# Altium PCB PCB.PcbDoc
Units mm, origin at the board's own origin, x right, y up, seen from the top; angles counter-clockwise.
Board outline 100 x 100 mm, 2 copper layers (Top Layer, Bottom Layer); 51 components, 32 nets, 171 pads, 426 vias.
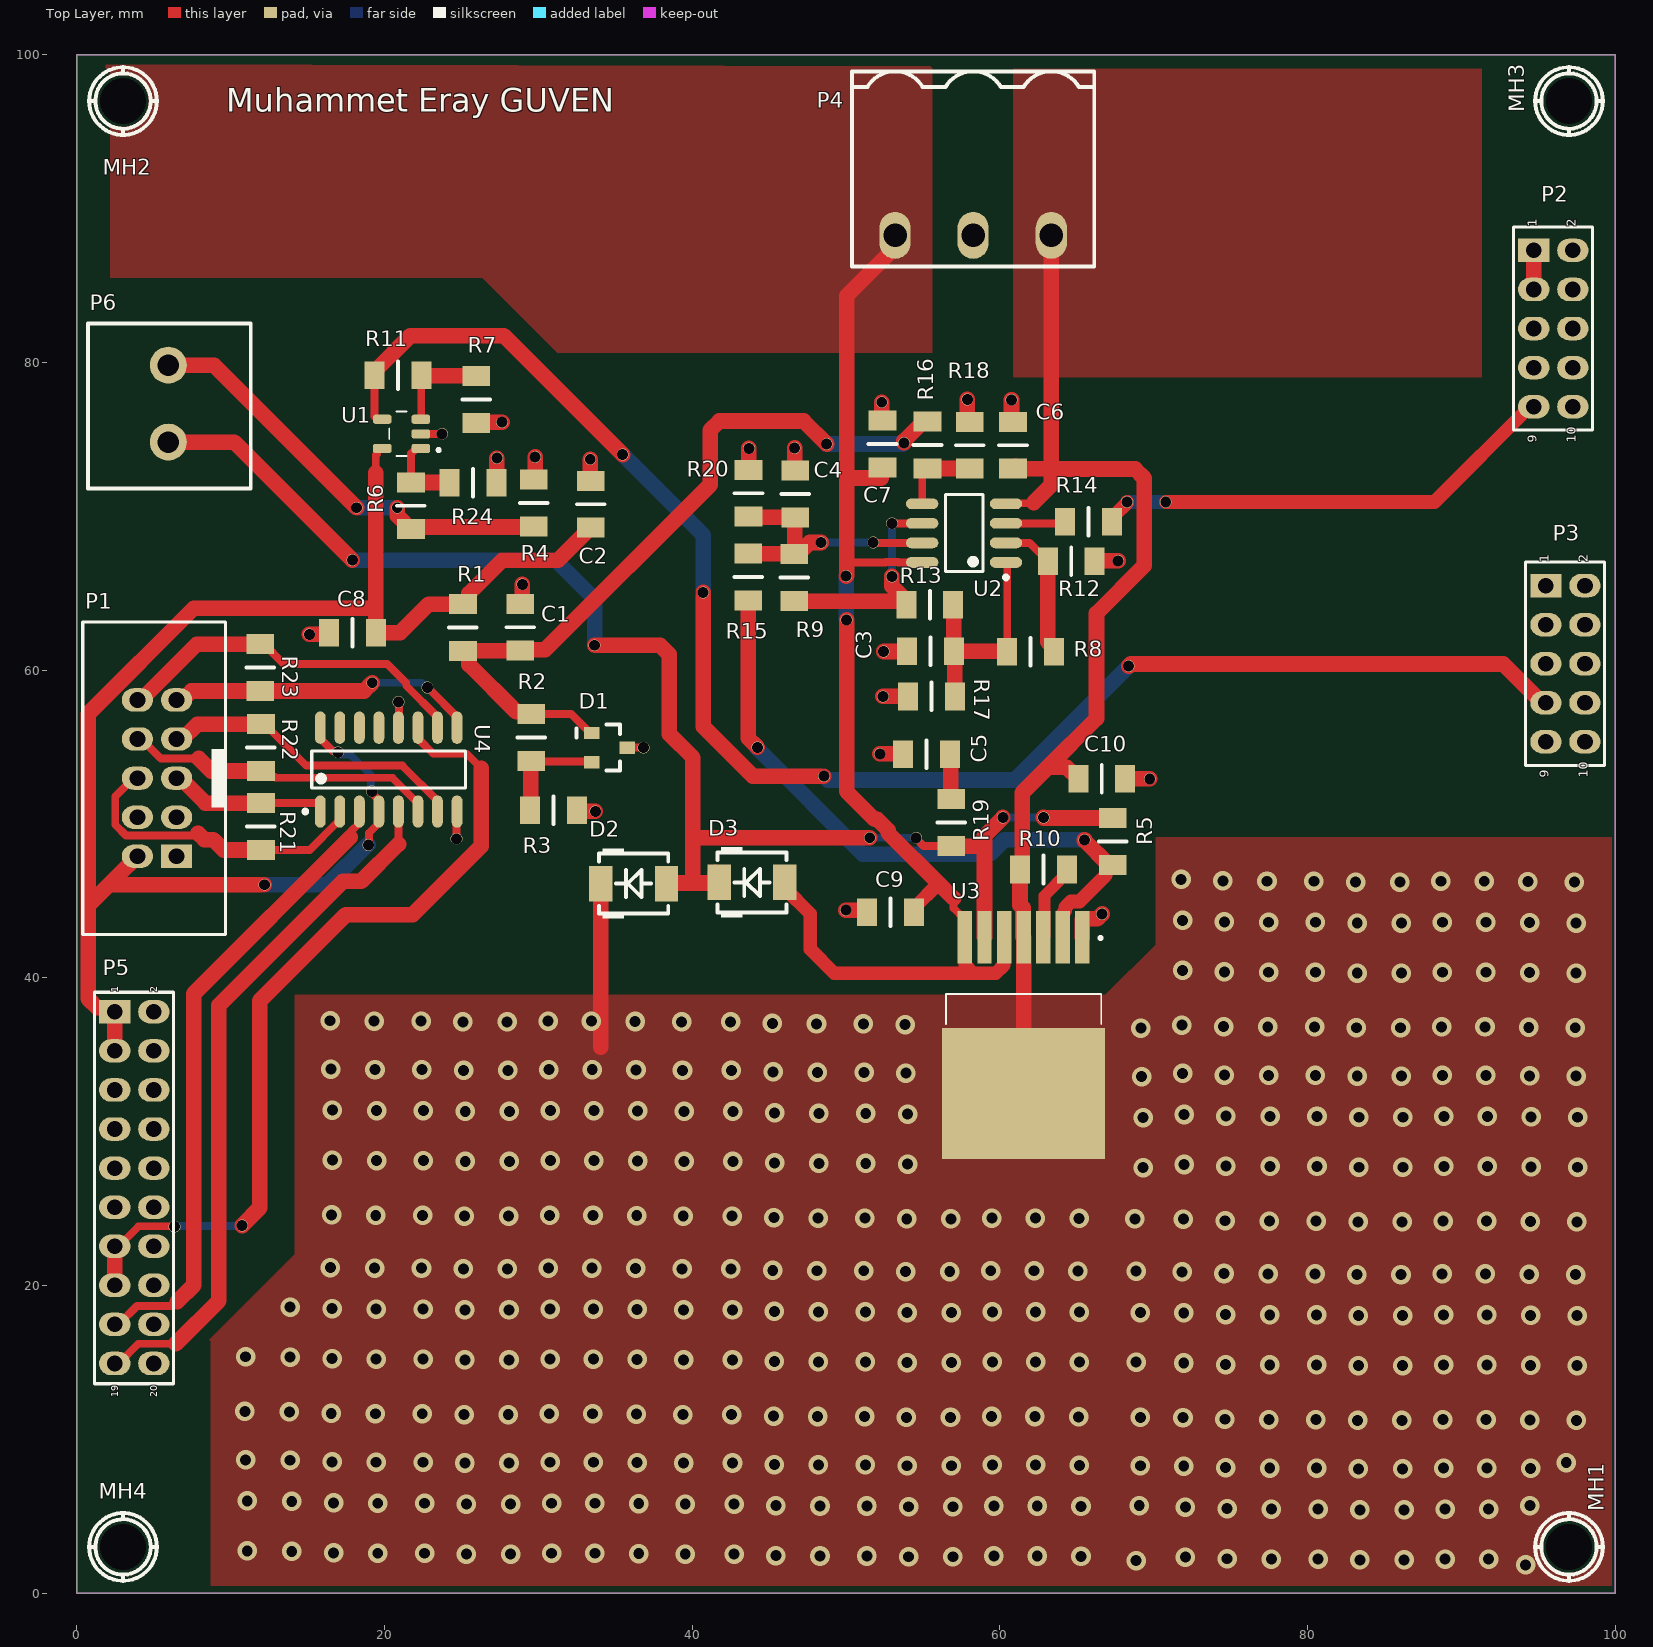
[diagram p0: Top Layer view]
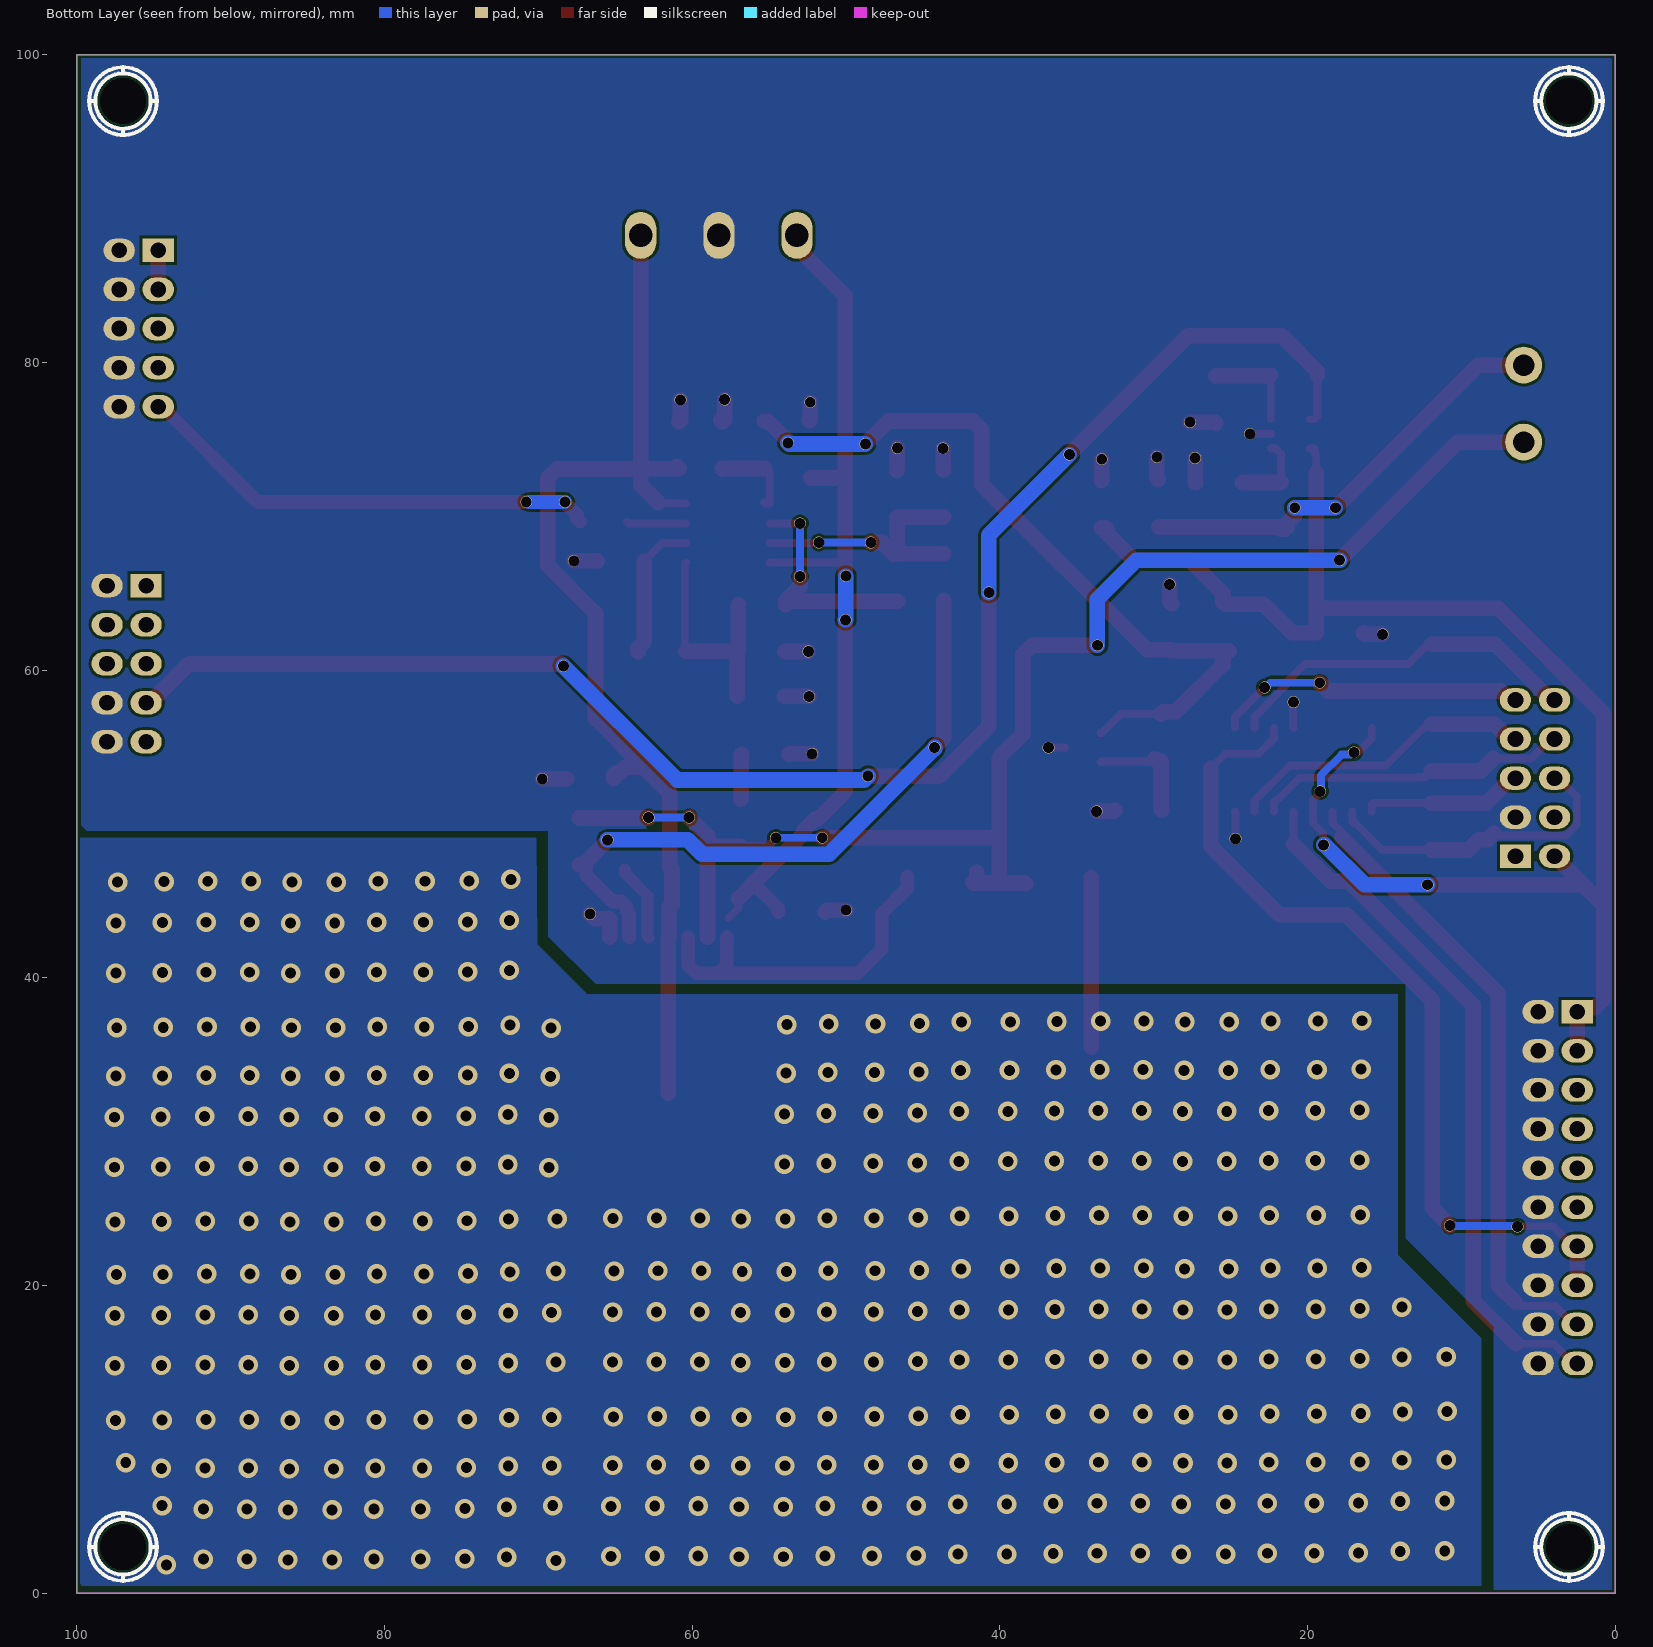
[diagram p1: Bottom Layer view, seen from below]
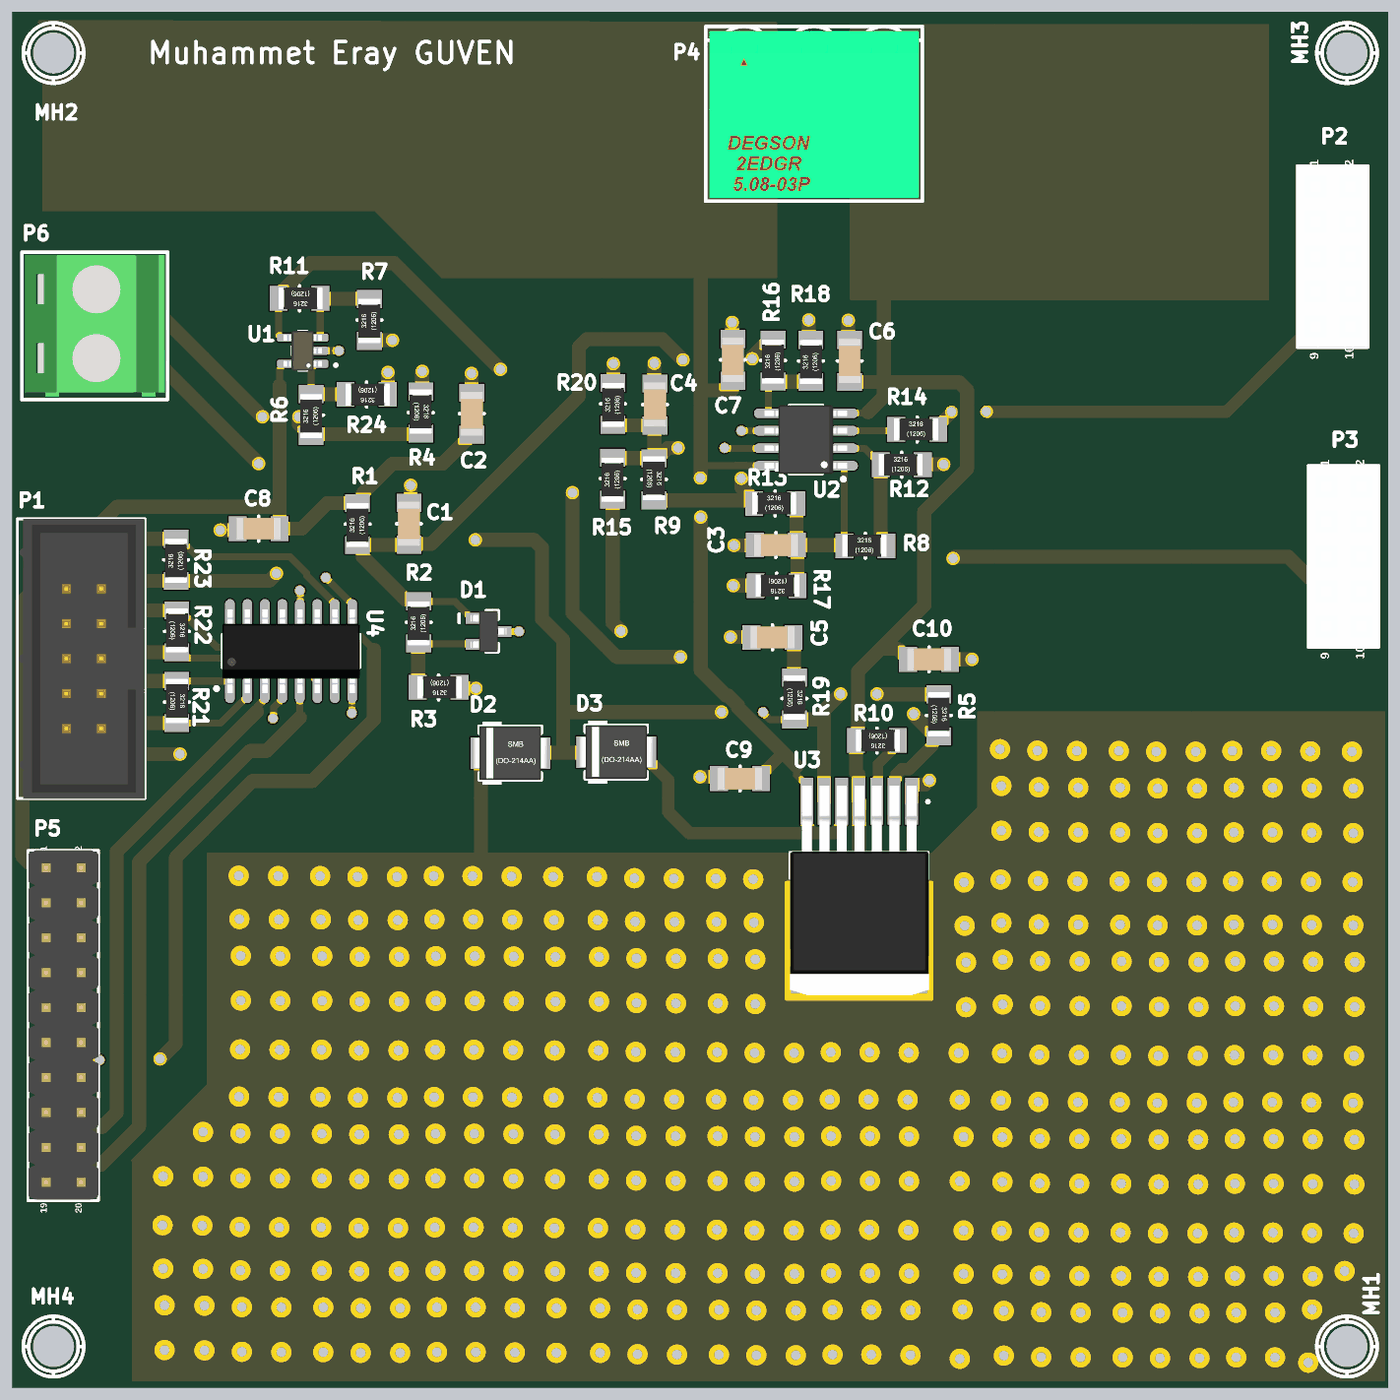
[diagram p2: 3D render of the assembled board from above, using the file's embedded part models]

## Layer stack, top to bottom
Top Solder: solder mask 0.0102, Solder Resist, Dk 3.5
Top Layer: signal copper 0.0356
Dielectric 1: dielectric 0.32, FR-4, Dk 4.8
Bottom Layer: signal copper 0.0356
Bottom Solder: solder mask 0.0102, Solder Resist, Dk 3.5

## Board outline
0,0 0,100 100,100 100,0

## Design rules (kind name [scope] priority, off if disabled: settings)
Clearance [All] p1: gap=0.178 ignorepadtopadclearanceinfootprint=FALSE
HoleSize [All] p1: absolutevalues=TRUE maxlimit=25.4 minlimit=0.025 maxpercent=80.000 minpercent=20.000
PolygonConnect PolygonConnect_2 [All vs IsNamedPolygon('NONET_L-01_P-001')] p1: connectstyle=Direct reliefconductorwidth=0.254 reliefentries=4 polygonreliefangle="90 Angle" airgapwidth=0.254
PolygonConnect PolygonConnect_1 [All vs IsNamedPolygon('NONET_L-01_P-001')] p2: connectstyle=Direct reliefconductorwidth=0.254 reliefentries=4 polygonreliefangle="90 Angle" airgapwidth=0.254
PolygonConnect [All] p3: connectstyle=Relief reliefconductorwidth=0.254 reliefentries=4 polygonreliefangle="90 Angle" airgapwidth=0.254
RoutingVias [All] p1: holewidth=0.711 width=0.762 viastyle="Through Hole" minholewidth=0.711 minwidth=0.762 maxholewidth=0.711 maxwidth=0.762
SolderMaskExpansion [All] p1: expansion=0.102 istentingtop=FALSE
SupplyNets "Schematic Supply Nets_3" [InNet('+16V')] p1: voltage=0.000
SupplyNets "Schematic Supply Nets_2" [InNet('-16V')] p2: voltage=0.000
SupplyNets "Schematic Supply Nets_1" [InNet('0V')] p3: voltage=0.000
SupplyNets "Schematic Supply Nets" [InNet('5V')] p4: voltage=0.000
Width [All] p1: maxlimit=1.016 minlimit=0.203 preferedwidth=0.508
29 further rules are at their usual default settings.

## Components (designator, comment, footprint, x,y, rotation, side; value= is the part's Value field where it differs from the comment)
C1 "2.2nF" CC3216-1206L 28.829,62.789 r90 top
C2 "100nF" CC3216-1206L 33.401,70.79 r90 top
C3 "100pF" CC3216-1206L 55.499,61.239 r0 top
C4 "100pF" CC3216-1206L 46.711,71.45 r270 top
C5 "10nF" CC3216-1206L 55.245,54.534 r0 top
C6 "100nF" CC3216-1206L 60.858,74.625 r90 top
C7 "100nF" CC3216-1206L 52.375,74.701 r270 top
C8 "100nF" CC3216-1206L 17.907,62.433 r180 top
C9 "100nF" CC3216-1206L 52.883,44.272 r0 top
C10 "100nF" CC3216-1206L 66.624,52.934 r0 top
D1 "TL431" SOT95P230X110-3N 34.62,54.966 r0 top
D2 "SK54BL" SMB 36.195,46.126 r0 top
D3 "SK54BL" SMB 43.893,46.203 r0 top
MH1 "MOUNTING HOLE" "MOUNTING HOLE ROUND NONPLATED 3MM PLASTIC" 97,3 r0 top
MH2 "MOUNTING HOLE" "MOUNTING HOLE ROUND NONPLATED 3MM PLASTIC" 3,97 r0 top
MH3 "MOUNTING HOLE" "MOUNTING HOLE ROUND NONPLATED 3MM PLASTIC" 97,97 r0 top
MH4 "MOUNTING HOLE" "MOUNTING HOLE ROUND NONPLATED 3MM PLASTIC" 3,3 r0 top
P1 "CONNECTOR, 2x5, 5P" HDR_BOX_2X5_10P_2.54MM_180 6.477,47.904 r270 top
P2 "CONNECTOR, 2x5, 5P" HDR_FEMALE_2X5_10P_2.54MM_180 94.71,87.29 r90 top
P3 "CONNECTOR, 2x5, 5P" HDR_FEMALE_2X5_10P_2.54MM_180 95.5,65.5 r90 top
P4 "CONNECTOR, 1x3, 3P" 2EDGR-5.08-03P 53.188,88.265 r0 top
P5 "CONNECTOR, 2x10, 20P" HDR_MALE_2X10_20P_2.54MM_180 2.46,37.79 r90 top
P6 "CONNECTOR, 1x2, 2P" DG128-5.0-02P-14 5.944,74.828 r90 top
R1 "2k2" CR3216-1206l 25.095,61.239 r90 top
R2 "0R" CR3216-1206l 29.54,54.102 r90 top
R3 "2k2" CR3216-1206l 32.512,50.902 r180 top
R4 "50m" CR3216-1206l 29.693,72.39 r270 top
R5 "24k" CR3216-1206l 67.335,50.394 r270 top
R6 "1k" CR3216-1206l 21.717,69.164 r90 top
R7 "1k" CR3216-1206l 25.959,76.073 r90 top
R8 "510R" CR3216-1206l 60.477,61.189 r0 top
R9 "1k" CR3216-1206l 46.634,67.539 r270 top
R10 "14.7k" CR3216-1206l 64.364,47.041 r180 top
R11 "14k" CR3216-1206l 22.403,79.172 r180 top
R12 "1k" CR3216-1206l 63.119,67.081 r0 top
R13 "1k" CR3216-1206l 53.924,64.262 r0 top
R14 "1k" CR3216-1206l 64.237,69.647 r0 top
R15 "4k7" CR3216-1206l 43.637,64.541 r90 top
R16 "1k" CR3216-1206l 55.296,73.127 r90 top
R17 "2k" CR3216-1206l 57.074,58.293 r180 top
R18 "1k" CR3216-1206l 58.039,73.101 r90 top
R19 "10R" CR3216-1206l 56.845,51.613 r270 top
R20 "2k" CR3216-1206l 43.663,69.977 r90 top
R21 "100R" CR3216-1206l 11.963,51.359 r270 top
R22 "100R" CR3216-1206l 11.963,56.49 r270 top
R23 "100R" CR3216-1206l 11.913,58.649 r90 top
R24 "1k" CR3216-1206l 27.28,72.187 r180 top
U1 "LMV321" SOT95P280X145-5N 21.107,75.362 r180 top
U2 "LM358DT" SOIC127P600X175-8N 57.676,68.91 r180 top
U3 "OPA548" TO127P1524X465-8N 61.544,36.287 r270 top
U4 "AM26LS32x" SOIC127P600X175-16N 15.824,50.811 r90 top

## Footprints (in the part's own frame and the unit in brackets; to place one, negate y for a bottom-side part, rotate by r counter-clockwise, add the part's x,y. Pads: shape width x height; smd on the part's side, far side on the other; paste and mask are expansions set on the pad)
2EDGR-5.08-03P [mil] "2EDGR-5.08-03P"
  oval 79.69x120 hole 60: 1(0,0) 2(200,0) 3(400,0)
  silkscreen extent -110,-80 510,420, body extent -100,-70 500,406, height 323
CC3216-1206L [mm] "Chip Capacitor, Body 3.2x1.6mm, IPC Low Density"
  rect 1.3x1.8 smd: 1(-1.524,0) 2(1.524,0)
  silkscreen extent 0,-0.9 0,0.9, body extent -1.6,-0.8 1.6,0.8, height 0.77
CR3216-1206l [mm] "Chip Resistor, Body 3.2 x 1.6 mm, IPC Low Density"
  rect 1.3x1.8 smd: 1(0,0) 2(3.048,0)
  silkscreen extent 1.52,-0.9 1.52,0.9, body extent -0.15,-0.8 3.05,0.8, height 0.55
DG128-5.0-02P-14 [mm] "TERM.BLK.5.00MM 2P PCB TYPE 1 BOY GREEN"
  round 2.4 hole 1.4: 1(0,0) 2(5,0)
  silkscreen extent -3.02,-5.36 7.7,5.23, body extent -2.8,-5.18 7.5,5.02, height 14.11
HDR_BOX_2X5_10P_2.54MM_180 [mil] "Box Header, 10p, 2.54mm, 180 degree"
  rect 60x80 hole 40: 1(0,0)
  oval 60x80 hole 40: 2(0,-100) 3(-100,0) 4(-100,-100) 5(-200,0) 6(-200,-100) 7(-300,0) 8(-300,-100) 9(-400,0) 10(-400,-100)
  silkscreen extent -600,-240 200,129, body extent -601,-237 201,124, height 374
HDR_FEMALE_2X5_10P_2.54MM_180 [mil] "Female Header, 10p, 2.54mm, 180 degree"
  rect 60x80 hole 40: 1(0,0)
  oval 60x80 hole 40: 2(0,-100) 3(-100,0) 4(-100,-100) 5(-200,0) 6(-200,-100) 7(-300,0) 8(-300,-100) 9(-400,0) 10(-400,-100)
  silkscreen extent -460,-150 60,52, body extent -460,-150 60,50, height 335
HDR_MALE_2X10_20P_2.54MM_180 [mil] "Male Header, 20p, 2.54mm, 180 degree"
  rect 60x80 hole 40: 1(0,0)
  oval 60x80 hole 40: 2(0,-100) 3(-100,0) 4(-100,-100) 5(-200,0) 6(-200,-100) 7(-300,0) 8(-300,-100) 9(-400,0) 10(-400,-100) 11(-500,0) 12(-500,-100) 13(-600,0) 14(-600,-100) 15(-700,0) 16(-700,-100) 17(-800,0) 18(-800,-100) 19(-900,0) 20(-900,-100)
  silkscreen extent -952,-150 50,52, body extent -950,-150 50,50, height 336
"MOUNTING HOLE ROUND NONPLATED 3MM PLASTIC" [mm] "Hole round nonplated, size 3mm, suitable for 3mm plastic screw"
  round 0 hole 3 unplated: 1(0,0)
  silkscreen extent -2.2,-2.2 2.2,2.2
SMB [mm] "DO-214-AA/SMB; 2 C-Bend Leads; Body 5.3 x 3.6 mm, inc. leads (LxW)"
  rect 1.52x2.3 smd: 1(2.135,0) 2(-2.135,0)
  silkscreen extent -2.25,-2.29 2.25,2.29, body extent -2.75,-1.95 2.75,1.95, height 2.42
SOIC127P600X175-8N [mm] "SOIC, 8-Leads, Body 4,90x3,90mm, Pitch 1,27mm, IPC Medium Density"
  oval 2.1x0.7 smd: 1(-2.725,1.905) 2(-2.725,0.635) 3(-2.725,-0.635) 4(-2.725,-1.905) 5(2.725,-1.905) 6(2.725,-0.635) 7(2.725,0.635) 8(2.725,1.905)
  silkscreen extent -2.85,-2.5 1.22,3.01, body extent -3,-2.5 3,2.5, height 1.75
SOIC127P600X175-16N [mm] "SOIC, 16-Leads, Body 9,90x3,90mm, Pitch 1,27mm, IPC Medium Density"
  oval 2.1x0.7 smd: 1(0,0) 2(0,-1.27) 3(0,-2.54) 4(0,-3.81) 5(0,-5.08) 6(0,-6.35) 7(0,-7.62) 8(0,-8.89) 9(5.45,-8.89) 10(5.45,-7.62) 11(5.45,-6.35) 12(5.45,-5.08) 13(5.45,-3.81) 14(5.45,-2.54) 15(5.45,-1.27) 16(5.45,0)
  silkscreen extent -0.12,-9.45 3.94,1.1, body extent -0.32,-9.45 5.77,0.56, height 1.65
SOT95P230X110-3N [mm] "SOT23, 3-Leads, Body 2.90x2.30mm, Pitch 0.95mm, IPC Medium Density"
  rect 1x0.8 smd: 1(-1.15,0.95) 2(-1.15,-0.95) 3(1.15,0)
  silkscreen extent -2.14,-1.5 0.7,1.5, body extent -1.3,-1.5 1.3,1.5, height 1.1
SOT95P280X145-5N [mm]
  rrect50% 1.21x0.59 smd: 1(-1.255,0.95) 2(-1.255,0) 3(-1.255,-0.95) 4(1.255,-0.95) 5(1.255,0.95)
  silkscreen extent -2.51,-1.45 0.8,1.45, body extent -1.4,-1.45 1.4,1.45, height 1.45
TO127P1524X465-8N [mm]
  rect 3.42x0.94 smd: 1(-6.34,3.81) 2(-6.34,2.54) 3(-6.34,1.27) 4(-6.34,0) 5(-6.34,-1.27) 6(-6.34,-2.54) 7(-6.34,-3.81)
  rect 8.5x10.58 smd paste-6: 4(3.8,0)
  silkscreen extent -6.4,-5.05 -0.7,5.1, body extent -7.48,-5.02 7.76,5.07, height 4.48

## Part data
C1 C2 C3 C4 C5 C6 C7 C8 C9 C10: library part "CAPACITOR NON-POL", "Capacitor", Component Type=Capacitor
D1: "REFERENCE DIODE PIN1:C, PIN2:REF, PIN3:A", Component Type=Diode
D2 D3: library part "DIODE SCHOTTKY", "SINGLE SCHOTTKY DIODE / Check the suitability of the case with the pin number", Component Type=Diode
P1 P2 P3: library part "CONNECTOR, 2x5, 10P", "CONNECTOR, 2x5, 10P", Component Type=Connector
R1 R2 R3 R4 R5 R6 R7 R8 R9 R10 R11 R12 R13 R14 R15 R16 R17 R18 R19 R20 R21 R22 R23 R24: library part RESISTOR, "Resistor", Component Type=Resistor
U1: library part OPAMP1, "Single Opamp / Check the suitability of the case with the pin number", Component Type=IC
U2: library part OPAMP2, "Dual Opamp", Component Type=IC
P4 P5 P6: Component Type=Connector

## Via types
v1: diameter 1.27, hole 0.711, Top Layer to Bottom Layer, 371 vias
v2: diameter 0.762, hole 0.711, Top Layer to Bottom Layer, 55 vias

## Nets (pads, with @x,y where several pads share a name; then routed paths per layer and width w, separated by ;. In a path a pad name is that pad's centre, name@x,y a point inside that pad or via, vN(x,y) a via of type N, cw(c..) or ccw(c..) an arc to the next point about the centre after c; other vN are vias at no path point)
0V: C1.2 C2.2 C3.1 C4.1 C5.1 C6.2 C7.1 C8.2 C9.1 C10.2 D1.3 P1.3 P2.2 P2.4 P2.6 P2.8 P2.10 P3.2 P3.8 P3.10 P4.2 P5.2 P5.4 P5.6 P5.8 P5.10 P5.12 P5.14 P5.16 P5.18 P5.20 R3.1 R4.1 R7.1 R12.2 R17.2 R18.2 R20.2 R24.1 U1.2 U3.1 U4.8 U4.12 | length 35.1
  Top Layer w0.508: U4.12 20.941,56.298 20.941,57.695 20.904,57.731 v2(20.904,57.937) ; U1.2 v2(23.749,75.362) ; v2(24.677,49.033) 24.677,50.774 U4.8 ; D1.3 v2(36.83,54.966)
  Top Layer w1.016: v2(15.113,62.332) 16.281,62.332 C8.2 ; R7.1 26.01,76.124 v2(27.635,76.124) ; R24.1 27.305,72.212 v2(27.305,73.787) ; C1.2 28.956,64.44 v2(28.956,65.583) ; R4.1 29.693,72.43 29.794,72.532 v2(29.794,73.863) ; R3.1 32.588,50.825 v2(33.706,50.825) ; v2(33.376,73.711) 33.376,72.339 C2.2 ; R20.2 43.688,73.05 v2(43.688,74.422) ; v2(46.66,74.447) 46.66,73.025 C4.1 ; v2(49.987,44.399) 51.232,44.399 C9.1 ; v2(52.197,54.559) 53.696,54.559 C5.1 ; v2(52.324,77.419) 52.324,76.276 C7.1 ; v2(52.4,58.293) R17.2 ; v2(52.451,61.214) 53.95,61.214 C3.1 ; v2(57.887,77.597) 57.887,76.291 58.029,76.149 R18.2 R18.2@58.141,76.251 ; v2(60.757,77.572) 60.757,76.251 C6.2 ; U3.1 65.354,43.791 65.392,43.829 66.333,43.829 v2(66.65,44.145) ; R12.2 66.192,67.107 v2(67.691,67.107) ; C10.2 v2(69.748,52.934)
2.5V: C1.1 D1.1 R1.1 R2.2 R16.2 | length 50.8
  Top Layer w0.508: R2.2 32.136,57.15 33.37,55.916 D1.1
  Top Layer w1.016: R2.2 29.398,57.292 28.56,57.292 25.487,60.365 25.487,61.097 25.345,61.239 R1.1 25.108,61.252 28.816,61.252 C1.1 28.891,61.327 30.44,61.327 41.173,72.06 41.173,75.605 41.769,76.2 47.244,76.2 v2(48.743,74.701) ; v2(53.772,74.778) 53.772,74.901 55.046,76.175 R16.2
  Bottom Layer w1.016: v2(48.743,74.701) 53.696,74.701 v2(53.772,74.778)
5V: C2.1 C8.1 P1.2 P5.1 P5.3 R1.2 U1.5 U4.4 U4.16 | length 106.8
  Top Layer w0.508: U4.16 15.824,55.561 16.637,54.748 16.891,54.748 v2(16.98,54.659) ; v2(18.948,48.641) 18.997,48.69 18.997,49.422 19.634,50.059 U4.4 19.634,51.563 19.177,52.02 v2(19.177,52.121) ; 19.435,72.822 19.435,73.994 19.501,74.061 19.501,74.371 19.542,74.412 U1.5
  Top Layer w1.016: P5.3 P5.1 2.206,38.044 1.331,38.044 0.736,38.639 0.736,44.703 ; P1.2 3.82,47.904 3.429,47.513 3.429,47.396 2.083,46.05 ; v2(12.192,46.05) 2.083,46.05 ; C8.1 C8.1@19.435,62.429 ; 19.435,72.822 19.435,64.008 ; C2.1 33.151,69.266 33.009,69.124 33.009,68.874 31.293,67.158 27.661,67.158 25.487,64.984 25.487,64.429 25.345,64.287 R1.2 22.868,64.287 21.01,62.429 C8.1@19.435,62.429 ; 0.736,44.703 0.736,57.165 7.59,64.019 19.424,64.019 19.435,64.008 ; 0.736,44.703 2.083,46.05 ; C8.1@19.435,62.429 19.435,64.008
  Bottom Layer w0.508: v2(16.98,54.659) 17.048,54.659 17.199,54.508 17.78,54.508 19.128,53.16 19.128,52.169 v2(19.177,52.121)
  Bottom Layer w1.016: v2(12.192,46.05) 16.281,46.05 18.872,48.641 v2(18.948,48.641)
5VA: P3.1
5VB: P2.1 P2.3 | length 2.8
  Top Layer w0.203: P2.3 P2.3@94.964,84.75
  Top Layer w1.016: P2.3 P2.1
+16V: C7.2 C9.2 D3.1 P4.1 U2.8 U3.5 U3.7 | length 81.9
  Top Layer w0.508: 50.038,67.005 52.57,67.005 52.595,67.031 53.374,67.031 53.399,67.005 U2.8 ; 56.998,45.161 56.998,44.526 U3.7@57.633,43.891
  Top Layer w0.889: D3.1@46.028,46.593 D3.1 46.028,45.813 47.67,44.17 47.67,41.865 49.241,40.294 58.276,40.294 ; C9.2 54.407,44.522 56.011,46.126 56.032,46.126 ; U3.7 57.76,42.601 57.76,40.811 58.276,40.294 ; U3.5 60.249,42.601 60.249,40.811 59.732,40.294 58.276,40.294
  Top Layer w1.016: v2(50.013,66.116) 50.038,66.142 50.038,67.005 50.038,72.492 ; v2(50.038,63.271) 50.038,52.121 51.859,50.3 52.039,50.3 52.738,49.6 52.738,49.421 56.032,46.126 56.998,45.161 ; 52.299,72.492 50.038,72.492 ; P4.1 53.188,87.48 50.038,84.331 50.038,72.492
  Bottom Layer w1.016: v2(50.013,66.116) 50.013,63.297 v2(50.038,63.271)
-16V: C6.1 C10.1 D2.2 P4.3 R10.2 U2.4 U3.4 | length 85.6
  Top Layer w0.508: U2.4 60.438,70.852 62.165,70.852 62.205,70.891
  Top Layer w1.016: 34.06,35.482 D2.2 D2.2@34.06,46.516 ; C6.1@61,73.243 C6.1 63.322,73.101 63.348,73.076 ; U3.4@61.544,32.487 61.544,42.627 61.506,42.665 61.506,44.544 61.316,44.735 R10.2 61.458,47.183 61.458,52.034 63.119,53.696 ; 62.205,70.891 63.348,72.034 63.348,73.076 ; P4.3 63.348,73.076 ; C10.1 65.1,53.184 64.958,53.326 64.708,53.326 64.338,53.696 63.119,53.696 ; 63.119,53.696 66.284,56.86 66.284,63.693 69.393,66.802 69.393,72.481 68.798,73.076 63.348,73.076
  other v1: 94.183,1.829 68.859,2.108 83.414,2.159 86.284,2.159 77.648,2.21 80.696,2.21 88.951,2.21 91.77,2.21 74.778,2.235 72.06,2.337 54.077,2.362 56.947,2.362 65.278,2.388 48.311,2.413 51.359,2.413 59.614,2.413 62.433,2.413 45.441,2.438 25.324,2.54 28.194,2.54 39.548,2.54 42.723,2.54 36.525,2.565 19.558,2.591 22.606,2.591 30.861,2.591 33.68,2.591 16.688,2.616 13.97,2.718 11.074,2.743 83.414,5.41 86.284,5.41 77.648,5.461 80.696,5.461 88.951,5.461 91.77,5.461 74.778,5.486 72.06,5.588 54.077,5.613 56.947,5.613 65.278,5.639 48.311,5.664 51.359,5.664 59.614,5.664 62.433,5.664 45.441,5.69 69.063,5.69 94.463,5.69 25.324,5.791 28.194,5.791 39.548,5.791 42.723,5.791 36.525,5.817 19.558,5.842 22.606,5.842 30.861,5.842 33.68,5.842 16.688,5.867 13.97,5.969 11.074,5.994 83.312,8.077 86.182,8.077 94.513,8.103 77.546,8.128 80.594,8.128 88.849,8.128 91.669,8.128 74.676,8.153 71.958,8.255 53.975,8.28 56.845,8.28 69.139,8.28 65.176,8.306 48.209,8.331 51.257,8.331 59.512,8.331 62.332,8.331 45.339,8.357 25.222,8.458 28.092,8.458 39.446,8.458 42.621,8.458 36.424,8.484 96.825,8.484 19.456,8.509 22.504,8.509 30.759,8.509 33.579,8.509 16.586,8.534 13.868,8.636 10.973,8.661 83.261,11.227 86.131,11.227 97.485,11.227 94.463,11.252 77.495,11.278 80.543,11.278 88.798,11.278 91.618,11.278 74.625,11.303 71.907,11.405 53.924,11.43 56.794,11.43 69.139,11.43 65.126,11.455 48.158,11.481 51.206,11.481 59.461,11.481 62.281,11.481 45.288,11.506 25.171,11.608 28.042,11.608 39.395,11.608 42.57,11.608 36.373,11.633 19.406,11.659 22.454,11.659 30.709,11.659 33.528,11.659 16.535,11.684 13.818,11.786 10.922,11.811 83.312,14.783 86.182,14.783 97.536,14.783 94.513,14.808 77.546,14.834 80.594,14.834 88.849,14.834 91.669,14.834 74.676,14.859 71.958,14.961 53.975,14.986 56.845,14.986 65.176,15.011 68.859,15.011 48.209,15.037 51.257,15.037 59.512,15.037 62.332,15.037 45.339,15.062 25.222,15.164 28.092,15.164 39.446,15.164 42.621,15.164 36.424,15.189 19.456,15.215 22.504,15.215 30.759,15.215 33.579,15.215 16.586,15.24 13.868,15.342 10.973,15.367 83.312,18.034 86.182,18.034 97.536,18.034 94.513,18.059 77.546,18.085 80.594,18.085 88.849,18.085 91.669,18.085 74.676,18.11 71.958,18.212 53.975,18.237 56.845,18.237 69.139,18.237 65.176,18.263 48.209,18.288 51.257,18.288 59.512,18.288 62.332,18.288 45.339,18.313 25.222,18.415 28.092,18.415 39.446,18.415 42.621,18.415 36.424,18.44 19.456,18.466 22.504,18.466 30.759,18.466 33.579,18.466 16.586,18.491 13.868,18.593 83.21,20.701 86.081,20.701 97.434,20.701 94.412,20.726 77.445,20.752 80.493,20.752 88.748,20.752 91.567,20.752 74.574,20.777 71.857,20.879 53.873,20.904 56.744,20.904 65.075,20.93 68.859,20.93 48.108,20.955 51.156,20.955 59.411,20.955 62.23,20.955 45.237,20.98 25.121,21.082 27.991,21.082 39.345,21.082 42.52,21.082 36.322,21.107 19.355,21.133 22.403,21.133 30.658,21.133 33.477,21.133 16.485,21.158 83.287,24.13 86.157,24.13 97.511,24.13 94.488,24.155 77.521,24.181 80.569,24.181 88.824,24.181 91.643,24.181 74.651,24.206 71.933,24.308 53.95,24.333 56.82,24.333 68.783,24.333 65.151,24.359 48.184,24.384 51.232,24.384 59.487,24.384 62.306,24.384 45.314,24.409 25.197,24.511 28.067,24.511 39.421,24.511 42.596,24.511 36.398,24.536 19.431,24.562 22.479,24.562 30.734,24.562 33.553,24.562 16.561,24.587 69.317,27.661 83.337,27.686 86.208,27.686 97.561,27.686 94.539,27.711 77.572,27.737 80.62,27.737 88.875,27.737 91.694,27.737 74.701,27.762 71.984,27.864 54,27.889 48.235,27.94 51.283,27.94 45.364,27.965 25.248,28.067 28.118,28.067 39.472,28.067 42.647,28.067 36.449,28.092 19.482,28.118 22.53,28.118 30.785,28.118 33.604,28.118 16.612,28.143 69.317,30.912 83.337,30.937 86.208,30.937 97.561,30.937 94.539,30.963 77.572,30.988 80.62,30.988 88.875,30.988 91.694,30.988 74.701,31.013 71.984,31.115 54,31.14 48.235,31.191 51.283,31.191 45.364,31.217 25.248,31.318 28.118,31.318 39.472,31.318 42.647,31.318 36.449,31.344 19.482,31.369 22.53,31.369 30.785,31.369 33.604,31.369 16.612,31.394 69.215,33.579 83.236,33.604 86.106,33.604 97.46,33.604 94.437,33.63 77.47,33.655 80.518,33.655 88.773,33.655 91.592,33.655 74.6,33.68 71.882,33.782 53.899,33.807 48.133,33.858 51.181,33.858 45.263,33.884 25.146,33.985 28.016,33.985 39.37,33.985 42.545,33.985 36.347,34.011 19.38,34.036 22.428,34.036 30.683,34.036 33.503,34.036 16.51,34.061 69.164,36.728 83.185,36.754 86.055,36.754 97.409,36.754 94.386,36.779 77.419,36.805 80.467,36.805 88.722,36.805 91.542,36.805 74.549,36.83 71.831,36.932 53.848,36.957 48.082,37.008 51.13,37.008 45.212,37.033 25.095,37.135 27.965,37.135 39.319,37.135 42.494,37.135 36.297,37.16 19.329,37.186 22.377,37.186 30.632,37.186 33.452,37.186 16.459,37.211 83.236,40.31 86.106,40.31 97.46,40.31 94.437,40.335 77.47,40.361 80.518,40.361 88.773,40.361 91.592,40.361 74.6,40.386 71.882,40.488 83.236,43.561 86.106,43.561 97.46,43.561 94.437,43.586 77.47,43.612 80.518,43.612 88.773,43.612 91.592,43.612 74.6,43.637 71.882,43.739 83.134,46.228 86.004,46.228 97.358,46.228 94.336,46.253 77.368,46.279 80.416,46.279 88.671,46.279 91.491,46.279 74.498,46.304 71.78,46.406
A: P1.6 R21.2 U4.2 | length 20.9
  Top Layer w0.508: P1.6@4.191,52.984 P1.6 3.683,52.984 2.489,51.791 2.489,49.95 3.189,49.251 7.722,49.251 7.874,49.403 ; R21.2 15.134,48.311 16.898,50.074 17.006,50.074 17.094,50.163 U4.2
  Top Layer w1.016: 7.874,49.403 8.291,48.986 8.865,48.986 9.539,48.311 R21.2
A': P1.5 R21.1 U4.1 | length 10.5
  Top Layer w0.508: R21.1 15.736,51.359 15.824,51.27 U4.1
  Top Layer w1.016: P1.5 6.731,52.984 8.357,51.359 R21.1
B: P1.8 R22.2 U4.6 | length 20.6
  Top Layer w0.508: P1.8 4.191,55.524 5.461,54.254 7.925,54.254 ; R22.2 12.359,53.046 12.871,53.046 12.907,53.01 20.511,53.01 21.973,51.548 22.086,51.548 22.174,51.459 U4.6
  Top Layer w1.016: 7.925,54.254 8.738,53.442 R22.2
B': P1.7 R22.1 U4.7 | length 20.1
  Top Layer w0.508: R22.1 12.213,56.49 14.906,53.797 21.158,53.797 23.444,51.511 U4.7
  Top Layer w1.016: P1.7 6.868,55.524 7.834,56.49 R22.1
Cout: P3.7 R11.2 U1.4 | length 104
  Top Layer w0.508: R11.2 19.355,76.499 19.542,76.312 U1.4
  Top Layer w1.016: R11.2 19.355,79.422 21.67,81.737 27.762,81.737 v2(35.484,74.016) ; v2(40.716,65.049) 40.716,56.337 43.942,53.111 v2(48.565,53.111) ; v2(68.377,60.274) 68.504,60.401 92.725,60.401 95.246,57.88 P3.7
  Bottom Layer w1.016: v2(35.484,74.016) 40.716,68.783 v2(40.716,65.049) ; v2(48.565,53.111) 48.819,52.857 60.96,52.857 v2(68.377,60.274)
DA: P5.17 U4.3 | length 41.4
  Top Layer w0.508: P5.17 2.714,17.47 3.908,18.664 6.243,18.664 6.528,18.948 ; 17.78,49.149 17.78,49.475 18.364,50.059 U4.3
  Top Layer w1.016: 6.528,18.948 7.595,20.015 7.595,38.964 17.78,49.149
DB: P5.19 U4.5 | length 45.8
  Top Layer w0.508: P5.19 2.714,14.93 3.989,16.205 6.426,16.205 ; 20.904,48.692 U4.5
  Top Layer w1.016: 6.426,16.205 9.22,18.999 9.22,38.202 17.297,46.279 18.491,46.279 20.904,48.692
DZ: P5.13 P5.15 U4.11 | length 55.7
  Top Layer w0.508: P5.13 2.714,22.55 4.015,23.851 6.325,23.851 v2(6.35,23.825) ; U4.11 22.174,55.561 23.163,54.572 25.337,54.572 26.289,53.619
  Top Layer w1.016: P5.15 P5.13 ; v2(10.744,23.901) 11.893,25.05 11.893,38.512 17.478,44.097 21.821,44.097 26.289,48.565 26.289,53.619
  Bottom Layer w0.508: v2(6.35,23.825) 6.388,23.863 10.706,23.863 v2(10.744,23.901)
NetC3_2: C3.2 R8.1 R13.2 R17.1 U2.1 | length 15.3
  Top Layer w0.508: U2.1 60.477,66.929 R8.1 R8.1@60.427,61.239
  Top Layer w1.016: R13.2 56.998,64.237 56.998,61.265 C3.2 R8.1@60.427,61.239 ; R17.1 C3.2@57.074,61.189
NetC4_2: C4.2 R9.1 R15.2 R20.1 U2.7 | length 17.1
  Top Layer w0.508: v2(51.765,68.301) 51.791,68.275 U2.7
  Top Layer w1.016: R15.2 43.663,67.564 46.609,67.564 R9.1 ; R20.1 43.688,69.952 46.66,69.952 46.698,69.913 46.672,69.888 46.672,67.577 R9.1 ; v2(48.387,68.301) 47.646,68.301 46.884,67.539 R9.1
  Bottom Layer w0.508: v2(48.387,68.301) v2(51.765,68.301)
NetC5_2: C5.2 R19.1 | length 3
  Top Layer w1.016: C5.2 56.807,54.496 56.807,51.651 R19.1
NetD1_2: D1.2 R2.1 R3.2 | length 7.4
  Top Layer w0.508: R2.1 29.583,54.059 33.427,54.059 D1.2
  Top Layer w1.016: R3.2 29.502,50.94 29.502,54.064 R2.1 ; R2.1@29.794,54.106 R2.1@29.932,54.244
NetP6_2: P6.2 R4.2 R6.1 | length 28.6
  Top Layer w1.016: P6.2 8.919,79.828 v2(18.186,70.561) ; v2(20.828,70.561) 20.828,70.053 21.325,69.556 21.325,69.306 21.467,69.164 R6.1 21.859,69.306 R4.2@29.657,69.306
  Bottom Layer w1.016: v2(18.186,70.561) v2(20.828,70.561)
NetR5_2: R5.2 R15.1 U3.2 | length 43.2
  Top Layer w0.889: U3.2 64.11,42.652 64.11,44.203 64.262,44.356 64.262,44.594 64.626,44.959 65.177,44.959 66.88,46.661 66.88,47.14 R5.2@67.085,47.346
  Top Layer w1.016: R15.1 43.637,55.587 v2(44.24,54.984) ; v2(65.507,48.971) 65.507,48.924 67.085,47.346 R5.2
  Bottom Layer w1.016: v2(44.24,54.984) 44.24,54.901 51.105,48.036 59.347,48.036 60.282,48.971 v2(65.507,48.971)
NetR6_2: R6.2 R24.2 U1.1 | length 5.2
  Top Layer w0.508: R6.2 21.717,74.076 22.052,74.412 U1.1
  Top Layer w1.016: R6.2 21.73,72.2 24.219,72.2 R24.2
NetR7_2: R7.2 R11.1 U1.3 | length 6.5
  Top Layer w0.508: U1.3 22.383,76.332 22.383,79.152 R11.1
  Top Layer w1.016: R11.1 22.428,79.146 25.933,79.146 R7.2
NetR8_2: R8.2 R12.1 U2.2 | length 9.3
  Top Layer w0.508: U2.2 61.925,68.275 R12.1
  Top Layer w1.016: R12.1 63.119,61.845 63.525,61.439 R8.2
NetR9_2: R9.2 R13.1 U2.6 | length 14.8
  Top Layer w0.508: v2(52.984,69.545) U2.6
  Top Layer w1.016: R9.2 53.782,64.491 53.924,64.349 R13.1 ; v2(52.984,66.091) 52.984,65.452 R13.1@53.924,64.512
  Bottom Layer w0.508: v2(52.984,66.091) v2(52.984,69.545)
NetR10_1: R10.1 U3.3 | length 5.1
  Top Layer w0.762: U3.3 62.903,42.716 62.903,45.33 64.364,46.791 R10.1
NetR14_1: R14.1 U2.3 | length 3.9
  Top Layer w0.508: U2.3 64.135,69.545 R14.1
NetR16_1: R16.1 R18.1 U2.5 | length 5.2
  Top Layer w0.508: R16.1@54.951,72.858 U2.5 55.233,70.815 U2.5@55.321,70.904
  Top Layer w1.016: R16.1 55.308,73.114 58.026,73.114 R18.1 R18.1@58.014,73.076
Vin: P2.9 R14.2 | length 30.7
  Top Layer w0.889: R14.2 67.49,69.852 67.49,70.102 68.263,70.875 v2(68.263,70.938) ; v2(70.786,70.938) 88.264,70.938 94.456,77.13 P2.9
  Bottom Layer w0.203: v2@70.608,70.938 v2(70.786,70.938)
  Bottom Layer w0.889: v2(68.263,70.938) v2@70.608,70.938
Vout: D2.1 D3.2 P6.1 R5.1 R19.2 U3.6 | length 94.9
  Top Layer w0.508: v2(54.564,49.103) 54.564,49.042 55.042,48.565 R19.2
  Top Layer w1.016: P6.1@5.594,74.828 10.236,74.828 v2(17.907,67.158) ; v2(33.655,61.62) 37.911,61.62 38.506,61.025 38.506,55.855 40.044,54.317 40.044,49.098 ; D2.1 38.368,46.164 40.044,46.164 ; D3.2@41.506,46.845 41.506,46.455 D3.2 41.719,46.164 40.044,46.164 ; v2(51.544,49.106) 40.051,49.106 40.044,49.098 ; R19.2 58.776,48.565 59.004,48.336 ; U3.6 59.004,48.336 ; v2(60.198,50.419) 59.004,49.225 59.004,48.336 ; v2(62.84,50.419) 62.865,50.394 R5.1 ; 40.044,46.164 40.044,49.098
  Bottom Layer w0.203: v2(60.198,50.419) v2@60.452,50.419
  Bottom Layer w0.508: v2(51.544,49.106) 51.546,49.105 54.525,49.105 54.544,49.124 v2(54.564,49.103) ; v2@60.452,50.419 v2(62.84,50.419)
  Bottom Layer w1.016: v2(17.907,67.158) 31.115,67.158 33.655,64.618 v2(33.655,61.62)
Z: P1.10 R23.2 U4.10 | length 23.8
  Top Layer w0.508: R23.2 12.163,61.697 13.458,60.401 20.176,60.401 21.412,59.165 21.412,58.993 23.444,56.961 U4.10
  Top Layer w1.016: P1.10 4.176,58.064 7.808,61.697 R23.2
Z': P1.9 R23.1 U4.9 | length 20.3
  Top Layer w0.508: v2(22.784,58.877) 22.911,58.75 22.925,58.75 24.714,56.961 U4.9
  Top Layer w1.016: P1.9 6.868,58.064 7.453,58.649 R23.1 18.669,58.649 v2(19.202,59.182)
  Bottom Layer w0.508: v2(19.202,59.182) 22.41,59.182 22.715,58.877 v2(22.784,58.877)
pads on no net: MH1.1 MH2.1 MH3.1 MH4.1 P1.1 P1.4 P2.5 P2.7 P3.3 P3.4 P3.5 P3.6 P3.9 P5.5 P5.7 P5.9 P5.11 U4.13 U4.14 U4.15

## Polygon pours and split planes (outlines as drawn)
-16V on Top Layer "NONET_L-01_P-001" (solid, pour order 3): 99.797,49.149 70.129,49.149 70.129,42.164 66.853,38.887 14.148,38.887 14.148,22.022 8.611,16.485 8.712,16.383 8.712,0.483 100.025,0.483
+16V on Top Layer "NONET_L-01_P-001" (solid, pour order 4): 55.474,99.263 55.601,99.136 55.601,80.645 31.217,80.645 26.365,85.496 2.184,85.496 2.184,98.857 1.651,99.39
-16V on Top Layer "NONET_L-01_P-001" (solid, pour order 1): 60.858,99.111 60.858,78.969 60.935,79.045 91.338,79.045 91.338,99.111
0V on Bottom Layer "NONET_L-01_P-001" (solid, pour order 10): 0.229,99.72 0.33,99.822 99.72,99.822 99.72,49.911 99.365,49.555 69.342,49.555 69.342,42.672 66.269,39.599 13.614,39.599 13.614,23.063 7.874,17.323 7.874,0.229 7.899,0.203 7.823,0.127 0.076,0.127
-16V on Bottom Layer "NONET_L-01_P-001" (solid, pour order 5): 70.129,49.149 70.18,49.098 99.771,49.098 99.771,0.508 99.72,0.457 99.695,0.483 8.687,0.483 8.687,16.561 14.122,21.996 14.122,38.938 66.827,38.938 70.053,42.164 70.079,42.164

## Keep-outs
Keep-Out Layer:
  lines w0.1: 0,0 0,100 100,100 100,0 0,0 ; 2.235,100 2.235,100 ; 100,3.48 100,3.48

## Silkscreen, mask and mechanical layers (free items; w line width, h text height)
Top Overlay:
  text "Muhammet Eray GUVEN" at 9.703,96.291 h1.52

## Text inside footprints (layer, text, board x,y; h text height)
P2: Top Overlay "9" at 95.091,74.793 h1.02 r90; Top Overlay "2" at 97.631,88.814 h1.02 r90; Top Overlay "1" at 95.091,88.814 h1.02 r90; Top Overlay "10" at 97.631,74.793 h1.02 r90
P3: Top Overlay "10" at 98.421,53.003 h1.02 r90; Top Overlay "2" at 98.421,67.024 h1.02 r90; Top Overlay "9" at 95.881,53.003 h1.02 r90; Top Overlay "1" at 95.881,67.024 h1.02 r90
P5: Top Overlay "1" at 2.841,39.06 h0.76 r90; Top Overlay "19" at 2.841,12.746 h0.76 r90; Top Overlay "20" at 5.381,12.746 h0.76 r90; Top Overlay "2" at 5.381,39.06 h0.76 r90